# Altium PCB rotary_breakout_module.PcbDoc
Units mm, origin at the board's own origin, x right, y up, seen from the top; angles counter-clockwise.
Board outline 17.78 x 15.24 mm, 2 copper layers (Top Layer, Bottom Layer), stack 1.569 mm thick; 2 components, 5 nets, 10 pads, 0 vias.
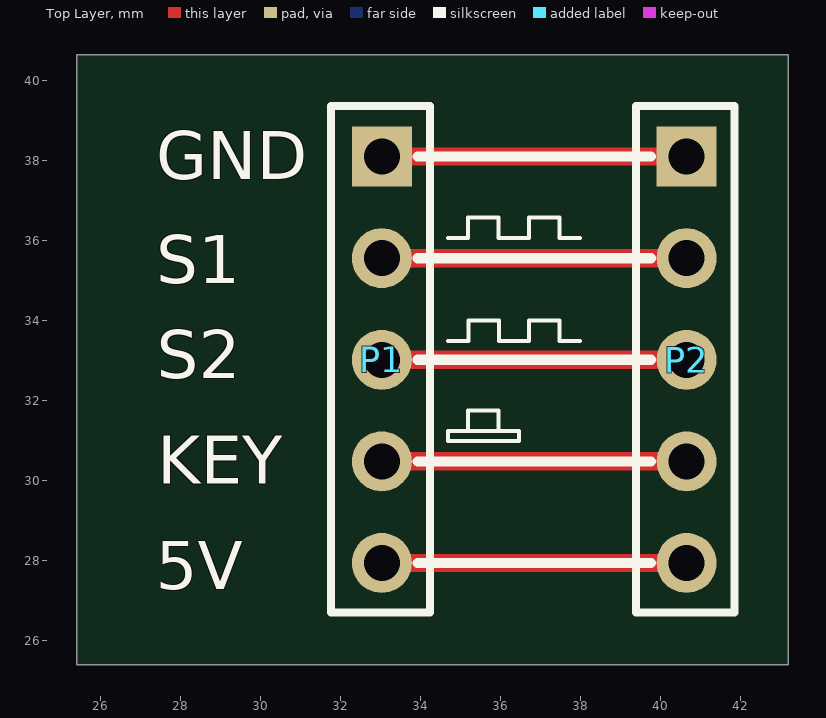
[diagram p0: Top Layer view]
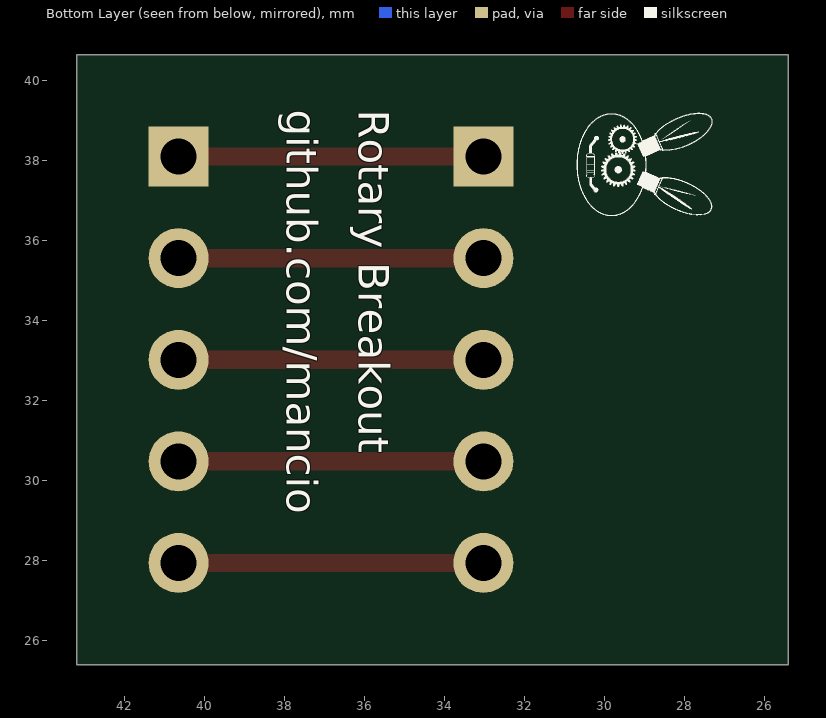
[diagram p1: Bottom Layer view, seen from below]

## Layer stack, top to bottom
Top Solder: solder mask 0.0254, SM-001, Dk 4
Top Layer: signal copper 0.035
Dielectric 1: core 1.4986, Core-043, Dk 4.3
Bottom Layer: signal copper 0.035
Bottom Solder: solder mask 0.0254, SM-001, Dk 4

## Board outline
25.4,25.4 43.18,25.4 43.18,40.64 25.4,40.64

## Design rules (kind name [scope] priority, off if disabled: settings)
Clearance [All] p1: gap=0.254 ignorepadtopadclearanceinfootprint=FALSE except(0: Arc-Hole Track-Hole SMDPad-Hole THPad-Hole Via-Hole Fill-Hole Poly-Hole Region-Hole Text-Hole)
PolygonConnect [All] p1: connectstyle=Relief reliefconductorwidth=0.254 reliefentries=4 polygonreliefangle="90 Angle" airgapwidth=0.254
RoutingVias [All] p1: holewidth=0.711 width=1.27 viastyle="Through Hole" minholewidth=0.711 minwidth=1.27 maxholewidth=0.711 maxwidth=1.27
SolderMaskExpansion [All] p1: expansion=0.102 istentingtop=FALSE
Width [All] p1: maxlimit=0.457 minlimit=0.305 preferedwidth=0.457 minimp=50.000000 maximp=50.000000 favimp=50.000000
30 further rules are at their usual default settings.

## Components (designator, comment, footprint, x,y, rotation, side; value= is the part's Value field where it differs from the comment)
P1 "Header_5_Encoder" HDR1X5_Encoder 33.02,30.5 r270 top
P2 "Header_5_Encoder" HDR1X5_Encoder 40.64,30.5 r270 top

## Footprints (in the part's own frame and the unit in brackets; to place one, negate y for a bottom-side part, rotate by r counter-clockwise, add the part's x,y. Pads: shape width x height; smd on the part's side, far side on the other; paste and mask are expansions set on the pad)
HDR1X5_Encoder [mm] "Header 5 pins for Encoder module"
  rect 1.5x1.5 hole 0.9: 1(-7.6,0)
  round 1.5 hole 0.9: 2(-5.06,0) 3(-2.52,0) 4(0.02,0) 5(2.56,0)
  silkscreen extent -8.87,-1.27 3.8,1.2

## Part data
P1 P2: "Header 5 pins to connect one encoder"

## Nets (pads, with @x,y where several pads share a name; then routed paths per layer and width w, separated by ;. In a path a pad name is that pad's centre, name@x,y a point inside that pad or via, vN(x,y) a via of type N, cw(c..) or ccw(c..) an arc to the next point about the centre after c; other vN are vias at no path point)
NetP1_1: P1.1 P2.1 | length 7.6
  Top Layer w0.457: P1.1 P2.1
NetP1_2: P1.2 P2.2 | length 7.6
  Top Layer w0.457: P1.2 P2.2
NetP1_3: P1.3 P2.3 | length 7.6
  Top Layer w0.457: P1.3 P2.3
NetP1_4: P1.4 P2.4 | length 7.6
  Top Layer w0.457: P1.4 P2.4
NetP1_5: P1.5 P2.5 | length 7.6
  Top Layer w0.457: P1.5 P2.5

## Silkscreen, mask and mechanical layers (free items; w line width, h text height)
Top Overlay:
  lines w0.1: 34.671,36.068 35.179,36.068 35.179,36.576 35.941,36.576 35.941,36.068 36.449,36.068 ; 34.674,33.493 35.182,33.493 35.182,34.001 35.944,34.001 35.944,33.493 36.452,33.493 ; 35.179,31.242 35.179,31.75 35.941,31.75 35.941,31.242 ; 36.195,36.068 36.703,36.068 36.703,36.576 37.465,36.576 37.465,36.068 37.973,36.068 ; 36.198,33.493 36.706,33.493 36.706,34.001 37.468,34.001 37.468,33.493 37.976,33.493 ; 34.671,30.988 34.671,31.242 36.449,31.242 36.449,30.988 35.941,30.988 35.179,30.988 34.671,30.988
  lines w0.254: 33.909,27.94 39.751,27.94 ; 33.909,30.48 39.751,30.48 ; 33.909,33.02 39.751,33.02 ; 33.909,35.56 39.751,35.56 ; 33.909,38.1 39.751,38.1
Bottom Overlay:
  drawing of 8 lines, arcs and shapes, not listed
  text "Rotary Breakout" at 36.134,39.275 h0.76 r90
  text "github.com/mancio" at 37.937,39.275 h0.76 r90
Outline Board:
  the board outline again, w0.254

## Dimensions
33.02,27.94 to 40.64,27.94 on Mechanical 1

## Text inside footprints (layer, text, board x,y; h text height)
P1: Top Overlay "5V" at 27.37,27.288 h1.2; Top Overlay "KEY" at 27.407,29.92 h1.2; Top Overlay "S2" at 27.388,32.553 h1.2; Top Overlay "S1" at 27.377,34.927 h1.2; Top Overlay "GND" at 27.377,37.527 h1.2